# Altium PCB Module Hub.PcbDoc
Units mil, origin at the board's own origin, x right, y up, seen from the top; angles counter-clockwise.
Board outline 4190 x 1250 mil, 2 copper layers (Top Layer, Bottom Layer); 57 components, 64 nets, 256 pads, 350 vias.
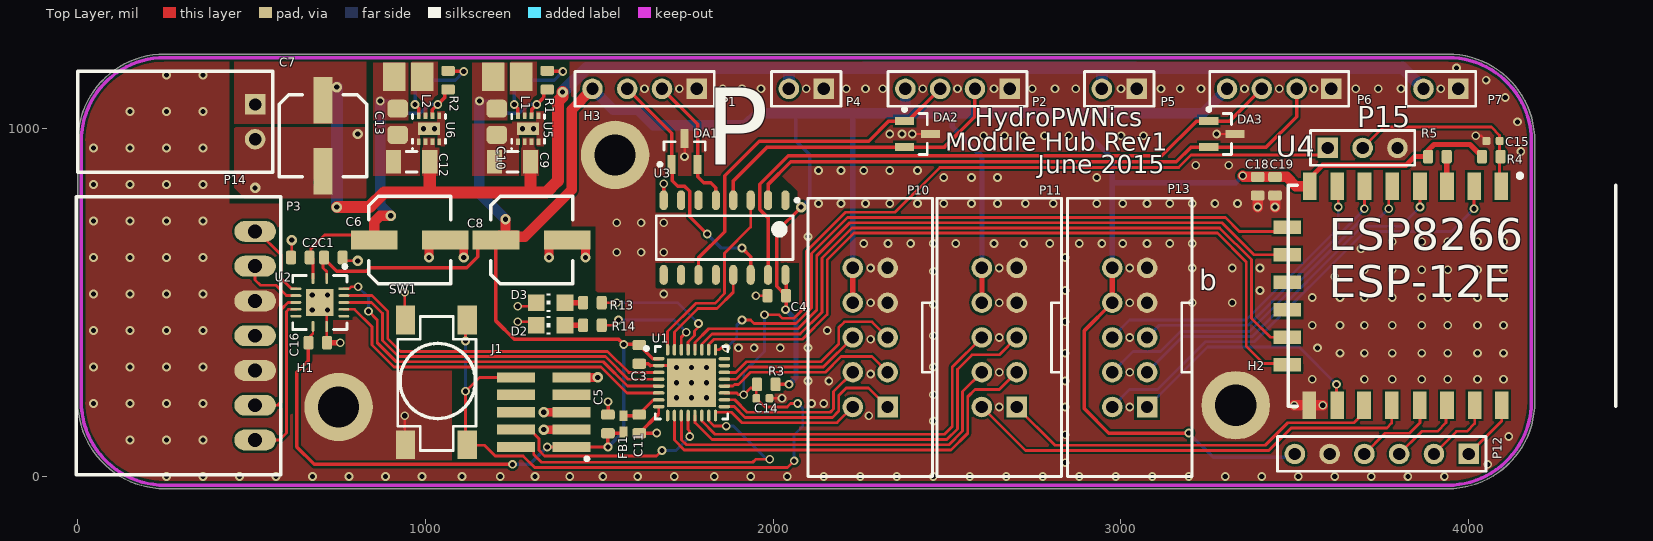
[diagram p0: Top Layer view]
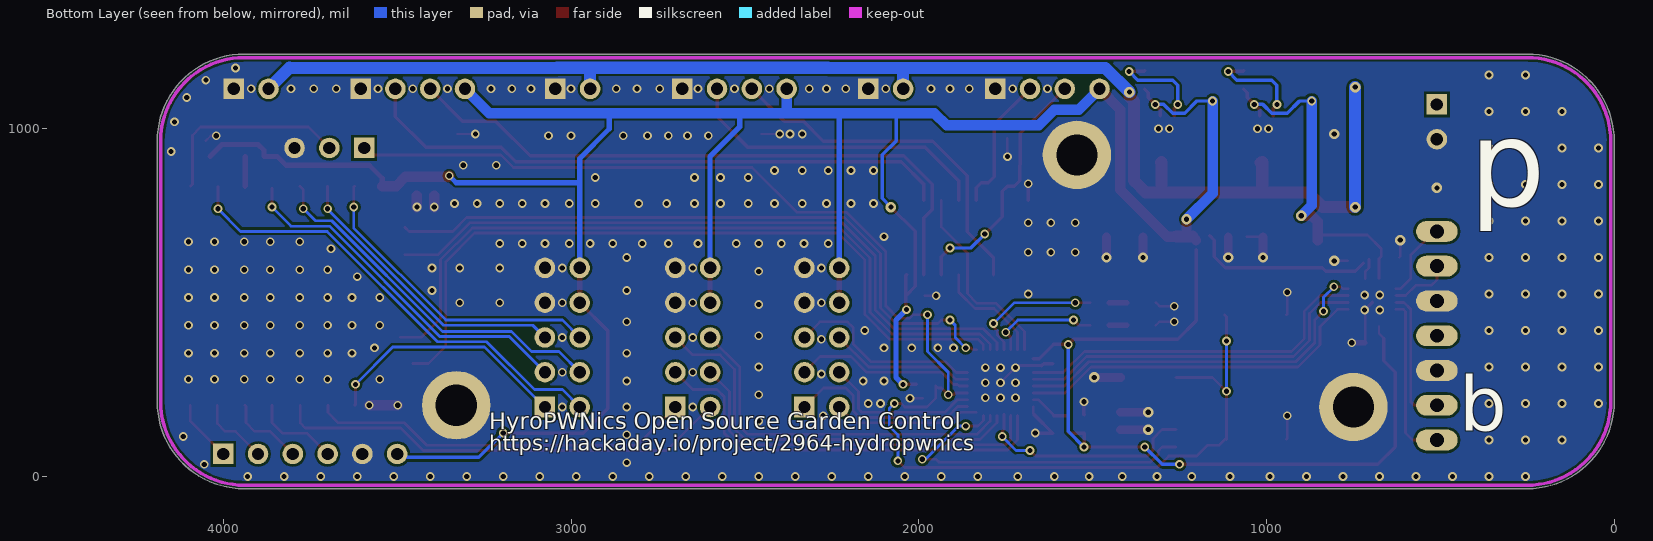
[diagram p1: Bottom Layer view, seen from below]

## Layer stack, top to bottom
Top Solder: solder mask 0.4, Solder Resist, Dk 3.5
Top Layer: signal copper 1.4
Dielectric 1: dielectric 12.6, FR-4, Dk 4.8
Bottom Layer: signal copper 1.4
Bottom Solder: solder mask 0.4, Solder Resist, Dk 3.5

## Board outline
0,215 0,965 cw(c250,965) 250,1215 3940,1215 cw(c3940,965) 4190,965 4190,215 cw(c3940,215) 3940,-35 250,-35 cw(c250,215)

## Design rules (kind name [scope] priority, off if disabled: settings)
AcuteAngle [All] p1: minimum=6.00000000000000E+0001 checktracksonly=FALSE
Clearance [All] p1: gap=7
ComponentClearance [All] p1: gap=0 collisioncheckmode=3 verticalgap=10 showdistances=FALSE
FanoutControl Fanout_SOIC [(InComponent('U8') AND InComponent('U7'))] p3: bgadir=Out bgaviamode=Centered fanoutstyle=Staggered fanoutdirection=Alternating viagrid=1 // Fanout_SOIC (Default Rule)
FanoutControl Fanout_Small [All] p4: bgadir=Out bgaviamode=Centered fanoutstyle=Auto fanoutdirection=Alternating viagrid=1 // Fanout_Small (Default Rule)
HoleSize [All] p1: absolutevalues=TRUE maxlimit=200 minlimit=15 maxpercent=80.000 minpercent=20.000
MinimumSolderMaskSliver [All] p1 off: minsoldermaskwidth=10
PasteMaskExpansion [All] p1: expansion=-1
PolygonConnect [All] p1: connectstyle=Direct reliefconductorwidth=10 reliefentries=4 polygonreliefangle="90 Angle" airgapwidth=10
RoutingVias [All] p1: holewidth=15 width=25 viastyle="Through Hole" minholewidth=15 minwidth=25 maxholewidth=28 maxwidth=50
SMDToCorner [All] p1: distance=30000
SilkToSilkClearance [All] p1 off: silktosilkclearance=10
SilkToSolderMaskClearance SilkscreenOverComponentPads [IsPad] p1 off: minsilkscreentomaskgap=10 clearancetoexposedcopper=TRUE
SolderMaskExpansion [All] p1: expansion=4
Width [All] p1: maxlimit=200 minlimit=7 preferedwidth=8 minimp=50.000000 maximp=50.000000 favimp=50.000000
22 further rules are at their usual default settings.

## Components (designator, comment, footprint, x,y, rotation, side; value= is the part's Value field where it differs from the comment)
C1 "100nF" C0603 735,630 r0 top
C2 "100nF" C0603 640,630 r180 top
C3 "100nF" C0603 1614.49,351.26 r270 top
C4 "100nF" C0603 2010,520 r180 top
C5 "0603" C0603 1524.49,151.26 r270 top
C6 "EEE-1VA101XP" EEE-1VA101XP 955,680 r180 top
C7 "EEE-1VA101XP" EEE-1VA101XP 705,980 r90 top
C8 "EEE-1VA101XP" EEE-1VA101XP 1305,680 r180 top
C9 "10uF 50V" C1206 1250,905 r180 top
C10 "0603" C0805 1205,1020 r90 top
C11 "0603" C0603 1614.49,151.26 r90 top
C12 "10uF 50V" C1206 960,905 r180 top
C13 "0603" C0805 920,1020 r90 top
C14 "100nF" C0402 1970,225 r0 top
C15 "100nF" C0402 4070,965 r180 top
C16 "100nF" C0603 690,385 r0 top
C18 "100nF" C0603 3393.03,834.92 r270 top
C19 "0603" C0603 3443.03,834.92 r90 top
D2 "5988140107F" LED2012120 1360,435 r180 top
D3 "5988140107F" LED2012120 1360,500 r180 top
DA1 "PESDxL2BT" SOT95P230X110-3N 1745,935 r90 top
DA2 "PESDxL2BT" SOT95P230X110-3N 2415,985 r0 top
DA3 "PESDxL2BT" SOT95P230X110-3N 3290,985 r0 top
FB1 "BLM15HG601SN1D" BLM18PG121SN1D 1569.49,151.26 r90 top
H1 "M3 Hole" Hole-3mm#1 750,200 r0 top
H2 "M3 Hole" Hole-3mm#2 3390,200 r0 top
H3 "M3 Hole" Hole-3mm#3 1550,835 r0 top
J1 "FTSH-105-XX-X-DV" FTSH-105-XX-X-DV 1340,185 r270 top
L1 "VLS252012T-2R2M1R3" VLS252012T-2R2M1R3 1235,1150 r180 top
L2 "VLS252012T-2R2M1R3" VLS252012T-2R2M1R3 950,1150 r180 top
P1 "Header 4" HDR1X4 1780,1115 r180 top
P2 "Header 4" HDR1X4 2680,1115 r180 top
P3 "Molex - 0705430006" 0705530041 510,705 r270 top
P4 "Header 2" HDR1X2 2145,1115 r180 top
P5 "Header 2" HDR1X2 3045,1115 r180 top
P6 "Header 4" HDR1X4 3605,1115 r180 top
P7 "Header 2" HDR1X2 3970,1115 r180 top
P10 "CNCTech 3020-10-0100-00" 3020-10-0100-00 2328.79,400 r90 top
P11 "CNCTech 3020-10-0100-00" 3020-10-0100-00 2700,400 r90 top
P12 "Header 6" HDR1X6 4000,65 r180 top
P13 "CNCTech 3020-10-0100-00" 3020-10-0100-00 3075,400 r90 top
P14 "Molex 0705530001" 0705530001 510,1070 r270 top
P15 "Header 3" HDR1X3 3595,945 r0 top
R1 "100K" R0603 1350,1140 r270 top
R2 "100K" R0603 1065,1140 r270 top
R3 "1K" R0603 1980,265 r0 top
R4 "1K" R0603 4065,920 r180 top
R5 "1K" R0603 3910,920 r0 top
R13 "1K" R0603 1480,500 r180 top
R14 "1K" R0603 1480,435 r180 top
SW1 "TL3301AF160QG" TL3301AF160QG 1120,450 r270 top
U1 "MKV10Z16VFM7 - 32 Pin QFN 5X5" MKV10Z16VFM7 1765,270 r0 top locked
U2 "TXS0104E" "RGY  (S-PVQFN-N14)" 696.1,500.63 r270 top locked
U3 "74HC4052" 74HC4052 1860,687.28 r270 top
U4 "ESP-12E" "ESP8266 ESP-12E" 3543.03,834.92 r270 top
U5 "TPS62162DSG" DSG8-1600X900TP 1295,1000 r90 top locked
U6 "TPS62163DSG" DSG8-1600X900TP 1010,1000 r90 top locked

## Footprints (in the part's own frame and the unit in brackets; to place one, negate y for a bottom-side part, rotate by r counter-clockwise, add the part's x,y. Pads: shape width x height; smd on the part's side, far side on the other; paste and mask are expansions set on the pad)
74HC4052 [mm] "SOIC, 16-Leads, Body 9.90x3.90mm, Pitch 1.27mm, IPC Medium Density"
  oval 1.45x0.6 smd: 1(-2.725,4.445) 2(-2.725,3.175) 3(-2.725,1.905) 4(-2.725,0.635) 5(-2.725,-0.635) 6(-2.725,-1.905) 7(-2.725,-3.175) 8(-2.725,-4.445) 9(2.725,-4.445) 10(2.725,-3.175) 11(2.725,-1.905) 12(2.725,-0.635) 13(2.725,0.635) 14(2.725,1.905) 15(2.725,3.175) 16(2.725,4.445)
  silkscreen extent -2.85,-5 1.6,5.42, body extent -2,-5 2,5, height 1.75
3020-10-0100-00 [mm] "2.54mm pitch 2X5 1 Pin Shrouded Connector"
  rect 1.5x1.5 hole 0.9: 1(-5.08,0)
  round 1.5 hole 0.9: 2(-5.08,2.54) 3(-2.54,0) 4(-2.54,2.54) 5(0,0) 6(0,2.54) 7(2.54,0) 8(2.54,2.54) 9(5.08,0) 10(5.08,2.54)
  silkscreen extent -10.16,-3.28 10.16,5.82, body extent -10.16,-3.3 10.16,5.84, height 9.1
0705530001 [mm]
  rect 1.5x1.5 hole 0.9: 1(0,0)
  round 1.5 hole 0.9: 2(2.54,0)
  silkscreen extent -2.44,-12.95 4.95,1.27, body extent -2.41,-12.88 4.95,0.71, height 6.96
0705530041 [mil] "Molex - 0705530041"
  oval 60x120 hole 40: 1(0,0) 2(100,0) 3(200,0) 4(300,0) 5(400,0) 6(500,0) 7(600,0)
  silkscreen extent -100,-515 700,73, body extent -100,-510 700,25, height 262
BLM18PG121SN1D [mm] "Chip Inductor, 2-Leads, Body 1.0x0.5mm, IPC Medium Density"
  rect 0.8x0.6 smd: 1(-0.6,0) 2(0.6,0)
  body extent -0.52,-0.28 0.53,0.27, height 0.6
C0402 [mil]
  rrect40% 22x24 smd: 1(-18.7,0) 2(19,0)
  body extent -20,-10 20,10, height 20
C0603 [mm]
  rrect40% 0.74x1 smd: 1(-0.68,0) 2(0.68,0)
  body extent -0.8,-0.4 0.8,0.4, height 0.8
C0805 [mil]
  rrect50% 52x60 smd: 1(-37.4,0) 2(38,0)
  body extent -40,-30 40,30, height 35
C1206 [mm]
  rect 1.1x1.7 smd: 1(-1.325,0) 2(1.325,0)
  silkscreen extent -0.4,-0.75 0.4,0.75, body extent -1.68,-0.87 1.67,0.88, height 1.6
DSG8-1600X900TP [mm] "SON, 8-Leads, Body 2x2mm, Pitch 0.5mm, Thermal Pad 1.6x0.9mm, TI Recommended"
  rect 0.5x0.28 smd paste-0.14 mask+0.07: 1(-0.95,0.75) 2(-0.95,0.25) 3(-0.95,-0.25) 4(-0.95,-0.75) 5(0.95,-0.75) 6(0.95,-0.25) 7(0.95,0.25) 8(0.95,0.75)
  rect 0.9x1.6 smd paste-0.45 mask+0.07: 9(0,0)
  silkscreen extent -1.5,-1.2 1.05,1.25, body extent -1.05,-1.05 1.05,1.05, height 0.8
EEE-1VA101XP [mm] "Panasonic VS D EEE-1VA101XP"
  rect 3.4x1.4 smd: 1(2.6,0) 2(-2.6,0)
  silkscreen extent -3,-3.2 3,3.2, body extent -3.5,-3.3 3.5,3.3, height 5.4
"ESP8266 ESP-12E" [mm]
  rect 2x1 smd: 1(0,13.99) 2(0,12.02) 3(0,10.02) 4(0,8.05) 5(0,6.01) 6(0,4) 7(0,2.01) 8(0,0) 15(16,-0.04) 16(16,2) 17(16,3.96) 18(16,5.98) 19(16,8.04) 20(16,10.02) 21(16,12.04) 22(16,14.02)
  rect 1x2 smd: 9(2.997,-1.651) 10(5.007,-1.651) 11(7.017,-1.651) 12(9.027,-1.651) 13(11.037,-1.651) 14(13.047,-1.651)
  silkscreen extent -0.91,-1.58 16.08,22.36, body extent 0,-1.52 16,22.48, height 2.7
FTSH-105-XX-X-DV [mm] "1.27mm pitch, 10 pin, terminal strip; vertical, SMT"
  rect 0.75x2.8 smd mask+0: 1(2.54,2.03) 2(2.54,-2.03) 3(1.27,2.03) 4(1.27,-2.03) 5(0,2.03) 6(0,-2.03) 7(-1.27,2.03) 8(-1.27,-2.03) 9(-2.54,2.03) 10(-2.54,-2.03)
  silkscreen extent 3.28,3.03 3.52,3.27
HDR1X2 [mm] "Connector; Header; 2 Position"
  rect 1.5x1.5 hole 0.9: 1(0,0)
  round 1.5 hole 0.9: 2(2.54,0)
  silkscreen extent -1.27,-1.27 3.81,1.27
HDR1X3 [mm] "Connector; Header; 3 Position"
  rect 1.5x1.5 hole 0.9: 1(0,0)
  round 1.5 hole 0.9: 2(2.54,0) 3(5.08,0)
  silkscreen extent -1.27,-1.27 6.35,1.27
HDR1X4 [mm] "Connector; Header; 4 Position"
  rect 1.5x1.5 hole 0.9: 1(0,0)
  round 1.5 hole 0.9: 2(2.54,0) 3(5.08,0) 4(7.62,0)
  silkscreen extent -1.27,-1.27 8.89,1.27
HDR1X6 [mm] "Connector; Header; 6 Position"
  rect 1.5x1.5 hole 0.9: 1(0,0)
  round 1.5 hole 0.9: 2(2.54,0) 3(5.08,0) 4(7.62,0) 5(10.16,0) 6(12.7,0)
  silkscreen extent -1.27,-1.27 13.97,1.27
Hole-3mm#1 [mm]
  round 5 hole 3: 1(0,0)
Hole-3mm#2 [mm]
  round 5 hole 3: 1(-1.524,0.127)
Hole-3mm#3 [mm]
  round 5 hole 3: 1(-0.127,2.286)
LED2012120 [mil]
  rect 48x48 smd: A(-41.34,0) C(42,0)
  silkscreen extent 0,-27 12,27, body extent -50,-25 50,25, height 28
MKV10Z16VFM7 [mm] "QFN, 32-Leads, Body 5.00x5.00mm, Pitch 0.50mm, Thermal Pad 3.60x3.60mm, IPC Medium Density"
  oval 0.85x0.25 smd: 1(-2.4,1.75) 2(-2.4,1.25) 3(-2.4,0.75) 4(-2.4,0.25) 5(-2.4,-0.25) 6(-2.4,-0.75) 7(-2.4,-1.25) 8(-2.4,-1.75) 17(2.4,-1.75) 18(2.4,-1.25) 19(2.4,-0.75) 20(2.4,-0.25) 21(2.4,0.25) 22(2.4,0.75) 23(2.4,1.25) 24(2.4,1.75)
  oval 0.25x0.85 smd: 9(-1.75,-2.4) 10(-1.25,-2.4) 11(-0.75,-2.4) 12(-0.25,-2.4) 13(0.25,-2.4) 14(0.75,-2.4) 15(1.25,-2.4) 16(1.75,-2.4) 25(1.75,2.4) 26(1.25,2.4) 27(0.75,2.4) 28(0.25,2.4) 29(-0.25,2.4) 30(-0.75,2.4) 31(-1.25,2.4) 32(-1.75,2.4)
  rect 3.556x3.556 smd: 33(0,0)
  silkscreen extent -3.42,-2.65 2.65,2.65, body extent -2.5,-2.5 2.5,2.5, height 1
R0603 [mm]
  rrect40% 0.74x1 smd: 1(-0.68,0) 2(0.68,0)
  body extent -0.8,-0.4 0.8,0.4, height 0.8
"RGY  (S-PVQFN-N14)" [mm] "QFN, 16-Leads, Body 3.50x3.50mm, Pitch 0.50mm, Thermal Pad 2.00x2.00mm, IPC Medium Density"
  oval 0.8x0.2 smd: 1(-1.75,0.5) 7(1.75,0.5) 8(1.75,-0.5) 14(-1.75,-0.5)
  oval 0.2x0.8 smd: 2(-1,1.75) 3(-0.5,1.75) 4(0,1.75) 5(0.5,1.75) 6(1,1.75) 9(1,-1.75) 10(0.5,-1.75) 11(0,-1.75) 12(-0.5,-1.75) 13(-1,-1.75)
  rect 2x2 smd: 15(0,0)
  silkscreen extent -2.75,-1.97 1.97,1.97, body extent -1.83,-1.83 1.83,1.83, height 1
SOT95P230X110-3N [mm]
  rect 1.4x0.6 smd: 1(-0.95,0.95) 2(-0.95,-0.95) 3(0.95,0)
  silkscreen extent -1.07,-1.5 0.7,1.92, body extent -0.7,-1.5 0.7,1.5, height 1.1
TL3301AF160QG [mm] "TL3301AF160QG Tactile Switch"
  rect 2.1x1.4 smd: 1(0,0) 1(9.1,0) 2(0,-4.5) 2(9.1,-4.5)
  silkscreen extent -0.25,-5.08 9.53,0.64, body extent -0.43,-5.26 9.57,0.74, height 5.11
VLS252012T-2R2M1R3 [mm] "Precision Wire Wound Inductor, 2-Leads, Body 2.5x2.0mm, IPC Medium Density"
  rect 1.65x2.1 smd: 1(-1.025,0) 2(1.025,0)
  body extent -1.3,-1.05 1.3,1.05, height 1.2

## Part data
C1 C2 C3 C4 C16 C18: library part C0603C104K5RACTU, "CAP CER 0603 100nF 50V 10% X7R"
C5 C11 C19: library part C1608JB0J106K080AB, "CAP CER 10UF 6.3V 10% JB 0603"
C6 C7 C8: "CAP ALUM 100UF 35V 20% SMD"
C9 C12: library part CL31A106KBHNNNE, "CAP CER 10UF 50V 10% X5R 1206"
C10 C13: library part CL21A226KQQNNNE, "CAP CER 22UF 6.3V 10% X5R 0805"
C14 C15: library part GRM155R71C104KA88D, "CAP CER 0402 100nF 16V 10% X7R"
D2 D3: "LED 0805 Yellow"
DA1 DA2 DA3: "PESDxL2BT TVS Diode Array 2x"
H1 H2 H3: library part Hole, "3mm Hole"
J1: library part "ARM Cortex JTAG-DEBUG Header"
P1 P2 P6: "Header, 4-Pin"
P3: library part 0705530041, "0705530041"
P4 P5 P7: "Header, 2-Pin"
P10 P11 P13: library part 3020-10-0100-00
P12: "Header, 6-Pin"
P14: library part 0705530001, "Molex 0705530002 Right Angle 2.54mm Shrouded Header"
P15: "Header, 3-Pin"
R1 R2: library part RC0603FR-07100KL, "RES 100K OHM 1/10W 1% 0603 SMD"
R3 R4 R5 R13 R14: library part ERJ-3EKF1001V, "RES 0603 1K 100mW 1%"
U1: library part MKV10Z16VFM7, "IC MCU ARM Cortex M0+ 16KB 32QFN 75MHZ"
U2: "TXS0104E - Bidriectional Opendrain/pushpull level shift"
U3: "Dual 4-channel analog multiplexer/demultiplexer"
U4: library part ESP-12, "Sketchy Chinese ESP8266 Board with Fake FCC Bullshit"
U5 U6: library part TPS62162SOP

## Via types
v1: diameter 25, hole 15, Top Layer to Bottom Layer, tented both sides, 333 vias
v2: diameter 30, hole 15, Top Layer to Bottom Layer, tented both sides, 17 vias

## Nets (pads, with @x,y where several pads share a name; then routed paths per layer and width w, separated by ;. In a path a pad name is that pad's centre, name@x,y a point inside that pad or via, vN(x,y) a via of type N, cw(c..) or ccw(c..) an arc to the next point about the centre after c; other vN are vias at no path point)
3.3VCC: C1.1 C3.1 C4.1 C5.2 C8.1 C10.2 C16.1 C18.1 C19.2 FB1.1 J1.1 L1.2 P1.4 P2.4 P6.4 P10.8 P10.10 P11.8 P11.10 P12.6 P13.8 P13.10 R1.2 R3.2 R4.2 R5.1 U1.1 U2.1 U2.8 U3.16 U4.8 U5.6 | length 11115.2
  Top Layer w7: C16.1@663.23,398.23 676.42,411.42 U2.8
  Top Layer w8: C1.1@705,625 705,600 715.79,589.21 U2.1
  Top Layer w10: C16.1@663.23,398.23 C16.1 663.23,333.23 630,300 630,85 680,35 v1(1250,35) ; C1.1@721.61,613.39 745,590 830,590 840,600 1118.18,600 1150,631.82 1150,680 C8.1@1162.5,692.5 ; 1202.64,652.36 1202.64,447.36 1255,395 1555,395 v1(1570,380) 1612.52,380 C3.1 1653.62,338.9 U1.1 ; U5.6 1304.84,1054.84 v1(1320,1070) 1340,1090 1340,1103.22 R1.2 ; v1(1350,85) J1.1 v1(1525,85) 1524.49,85.51 C5.2 1566.34,124.49 FB1.1 ; R3.2 v1(2045,265) ; v1(2035,480) 2036.77,481.77 C4.1 2010,546.77 2010,705 v2(2080,775) ; U3.16 2036.77,578.23 C4.1@2036.77,522.28 ; P13.8 2895,420 2895,195 2965,125 v1(3195,125)
  Top Layer w15: P10.8 P10.10 ; P11.8 P11.10 ; P13.8 P13.10 ; U4.8 3543.03,858.03 3580,895 3820,895 3845,920 R5.1 3883.23,938.23 3900,955 4003.22,955 R4.2
  Top Layer w30: C8.1 C8.1@1212.64,690 ; C8.1@1230,707.36 v2(1230,740) ; C8.1@1260,690 1285,690 1420,825 1420,1055 P1.4 ; v1(3350,865) 3353.31,861.69 C18.1 C19.2 3476.26,861.69 3503.03,834.92 U4.8
  Top Layer w35: C8.1@1212.64,690 C8.1@1260,690
  Bottom Layer w10: v1(1155,1080) 1200,1080 1235,1045 1270,1045 1295,1070 v1(1320,1070) ; v1(1250,35) 1300,35 v1(1350,85) ; v1(1525,85) 1570,130 v1(1570,380) ; 2065,1045 2065,965 2105,925 2105,800 v2(2080,775) ; v1(3195,125) 3265,55 3490,55 P12.6
  Bottom Layer w15: v1(2035,480) 2065,450 2065,285 v1(2045,265) ; P10.10 2228.79,1036.29 2237.5,1045 ; 2515,1045 2515,1005 2600,920 P11.10 ; 2890,1045 2890,1000 2975,915 2975,845 ; P13.10 2975,845 ; v1(3350,865) 3330,845 2975,845
  Bottom Layer w30: v1(1155,1080) 1155,815 v2(1230,740) ; P1.4 1540,1055 1610,1055 1655,1010 1920,1010 1955,1045 2065,1045 2237.5,1045 2380,1045 ; P2.4 2380,1045 ; P6.4 3235,1045 2890,1045 2515,1045 2380,1045
5VCC: C2.1 C6.1 C13.2 L2.2 R2.2 U2.14 U6.6 | length 1008.7
  Top Layer w8: U2.14 676.42,626.42 670,632.83 670,655 710,695 C6.1@840,695
  Top Layer w10: U6.6 1019.84,1054.84 v1(1035,1070) 1055,1090 1055,1103.22 R2.2
  Top Layer w30: C6.1 852.64,732.64 870,750 v2(900,750)
  Bottom Layer w10: v1(870,1080) 905,1080 940,1045 985,1045 1010,1070 v1(1035,1070)
  Bottom Layer w30: v1(870,1080) 870,780 v2(900,750)
12VCC: C7.1 C9.1 C12.1 P4.2 P5.2 P7.2 P14.1 U5.2 U5.3 U6.2 U6.3 | length 4102.9
  Top Layer w30: C12.1@1017.17,905 C12.1@1020,902.17 ; C9.1 C9.1@1305,902.17
  Top Layer w35: v2(745,775) 839.14,775 881.3,817.17 1302.17,817.17 ; 1012.17,822.17 C12.1 ; C9.1 1302.17,817.17 ; v2(1394.19,1105.59) 1394.19,1091.92 1380.5,1078.23 1380.5,850.5 1347.17,817.17 1302.17,817.17
  Bottom Layer w35: v2(745,775) v2(745,1120) ; v2(1394.19,1105.59) 1463.59,1175 2040,1175 ; P4.2 2045,1170 2040,1175 ; 2260,1175 2040,1175 ; 2260.5,1175.5 2945,1175.5 ; P5.2 2945,1175.5 ; 3039.5,1175 3809.5,1175 ; 3039.5,1175.5 2945,1175.5 ; 3809.5,1175.5 P7.2
ESP_ADC: P13.2 U4.2 | length 1339.8
  Top Layer w8: v1(4015,770) U4.2@4015,833.66
  Bottom Layer w8: P13.2 3025,250 3105,250 3242.5,387.5 3383.71,387.5 3701.21,705 3950,705 v1(4015,770)
ESP_MK_CS: U1.25 U4.9 | length 1943.5
  Top Layer w8: U1.25 1844.49,364.49 1850,370 v1(1865,370) ; v1(1910,450) 1935,450 1945,440 2065,440 2110,485 2110,641.21 2213.79,745 3300,745 3340,705 3466.11,705 U4.9
  Bottom Layer w8: v1(1865,370) 1895,400 1895,435 v1(1910,450)
ESP_RESET: C15.1 P15.2 R4.1 U4.1 | length 576.9
  Top Layer w8: P15.2 3755,1005 4065,1005 4088.7,981.3 C15.1 4088.7,840.04 U4.1
EXP0: P10.2 U1.16 | length 446.1
  Top Layer w8: U1.16@1835,185 1879.49,185 1909.49,155 2183.79,155 P10.2 P10.2@2228.79,178.79
EXP1: P10.1 U1.17 | length 566.5
  Top Layer w8: U1.17 1887.68,201.1 1918.79,170 2170,170 2188.26,188.26 2188.26,233.26 2210,255 2273.79,255 P10.1
EXP2: P10.4 U1.18 | length 461
  Top Layer w8: U1.18 1889.21,220.79 1925,185 2163.79,185 2173.26,194.47 2173.26,244.47 P10.4
EXP3: P10.3 U1.20 | length 523.1
  Top Layer w8: U1.20 1883.94,260.16 1888.79,265 1900,265 1935,300 2150,300 2195,345 2283.79,345 P10.3
EXP4: P10.6 U1.21 | length 419.1
  Top Layer w8: U1.21 1859.65,280 1893.79,280 1928.79,315 2143.79,315 P10.6
EXP5: P10.5 U1.22 | length 576.1
  Top Layer w8: U1.22 1892.1,299.53 1922.57,330 2137.57,330 2188.26,380.69 2188.26,428.26 2205,445 2283.79,445 P10.5
EXP6: P11.6 U1.14 | length 1053.1
  Top Layer w8: U1.14 1794.53,159.34 1832.37,121.5 2492.86,121.5 2514.47,143.11 2514.47,314.47 P11.6
EXP7: P11.5 U1.13 | length 1187.7
  Top Layer w8: U1.13 1775,175.51 1775,155 1823.5,106.5 2499.07,106.5 2529.47,136.9 2529.47,308.26 2571.21,350 2650,350 P11.5
EXP8: P11.4 U1.11 | length 1092.9
  Top Layer w8: U1.11 1736.5,174.48 1736.5,105.27 1750.27,91.5 2505.29,91.5 2544.47,130.69 2544.47,244.47 P11.4
EXP9: P11.3 U1.10 | length 1220.8
  Top Layer w8: U1.10 1715.79,104.77 1744.05,76.5 2511.5,76.5 2559.47,124.47 2559.47,229.47 2580,250 2650,250 P11.3
GND: C1.2 C2.2 C3.2 C4.2 C5.1 C6.2 C7.2 C8.2 C9.2 C10.1 C11.1 C12.2 C13.1 C14.2 C15.2 C16.2 C18.2 C19.1 D2.C D3.C DA1.3 DA2.3 DA3.3 H1.1 H2.1 H3.1 J1.3 J1.5 J1.9 P1.1 P2.1 P3.3 P3.5 P4.1 P5.1 P6.1 P7.1 P10.7 P10.9 P11.7 P11.9 P12.5 P13.7 P13.9 P14.2 P15.3 SW1.2 U1.2 U1.8 U1.33 U2.7 U2.15 U3.8 U4.15 U5.1 U5.4 U5.5 U5.9 U6.1 U6.4 U6.5 U6.9 | length 1809
  Top Layer w7: v2@615,675 615,633.23 C2.2@618.23,630 ; U2.15@715.79,480.94 U2.7 715.79,385.98 C16.2 ; C1.2@766.77,620 v2(805,620) ; v1(940,175) 940,109.57 SW1.2@942.83,106.73 ; v1(940,530) 940,467.83 SW1.2@942.83,465 ; C6.2@1010,690 C6.2@1057.36,690 ; v1(1265,445) 1308,445 D2.C ; v1(1265,490) 1308,490 D3.C ; 1670,180 1670.51,180.51 U1.8 ; U1.33@1715.79,319.21 v1(1721.69,313.31) v1(1765,270) ; v1(1745,920) DA1.3 ; v1(1950,520) C4.2 ; C14.2 v1(2025,225) ; v1(2400,985) DA2.3 ; v1(3275,985) DA3.3 ; v1(4020,980) 4036,980 C15.2
  Top Layer w9: 1645.79,319.21 U1.2 U1.33@1715.79,319.21
  Top Layer w10: U2.15 U2.15@715.79,480.94 ; C5.1 1525,178.54 v1(1525,215) ; C11.1 C11.1@1615,125 ; C3.2 1640.51,324.49 1645.79,319.21 ; v1(1665,125) C11.1@1615,125 ; 1670,180 C11.1@1615,125 ; U3.8 v1(1685,842.28)
  Top Layer w15: C16.2 v1(755,385)
  Top Layer w25: v2(1010,630) C6.2@1010,690 ; v2@1110,640 C6.2@1110,690 ; v2(1340,135) J1.3 ; v2(1340,185) J1.5 ; v2@1355,640 C8.2@1355,690 ; J1.9 v2(1495,285) ; v2@1460,640 C8.2@1460,690
  Top Layer w30: v1(3393.03,774.92) C18.2 ; v1(3443.03,774.92) C19.1 ; v1(3498.03,204.92) v1@3580,204.92
  other v1: 255,0 360,0 465,0 570,0 675,0 780,0 885,0 990,0 1105,0 1215,0 1315,0 1415,0 1510,0 1610,0 1715,0 1830,0 1935,0 2040,0 2145,0 2250,0 2355,0 2460,0 2565,0 2670,0 2775,0 2880,0 2985,0 3090,0 3195,0 3300,0 3405,0 3510,0 3615,0 3720,0 3825,0 3930,0 4055,35 2840,40 150,105 255,105 360,105 4115,115 2840,120 2460,160 2275,175 2650,200 2840,200 3025,200 3580,205 45,210 150,210 255,210 360,210 2110,210 2145,210 1721.69,226.69 1765,226.69 1808.31,226.69 2460,235 1721.69,270 1808.31,270 2100,275 2160,275 2840,275 3550,280 3700,280 3780,280 3865,280 3940,280 4025,280 4100,280 2280,295 2650,300 3025,300 1765,313.31 1808.31,313.31 45,315 150,315 255,315 360,315 2460,315 2840,355 3630,355 3700,355 3780,355 3865,355 3940,355 4025,355 4100,355 1900,370 1945,370 2020,370 2100,370 3565,370 2280,395 2650,400 3025,400 2460,405 45,420 150,420 255,420 360,420 2155,420 3550,435 3630,435 3700,435 3780,435 3865,435 3940,435 4025,435 4100,435 2840,445 674.45,478.98 717.76,478.98 2460,495 2280,500 2650,500 3025,500 3205,500 3320,500 3550,515 3630,515 3700,515 3780,515 3865,515 3940,515 4025,515 4100,515 674.45,522.28 717.76,522.28 45,525 150,525 255,525 360,525 1685,525 2840,535 3400,535 3615,575 2460,590 3700,595 3780,595 3865,595 3940,595 4025,595 4100,595 2280,600 2650,600 3025,600 3205,600 3320,600 3400,600 45,630 150,630 255,630 360,630 2840,630 1550,645 1620,645 1685,645 3690,655 2260,670 2330,670 2395,670 2460,670 2525,670 2635,670 2720,670 2795,670 2880,670 2945,670 3005,670 3075,670 3140,670 3205,670 3780,675 3865,675 3940,675 4025,675 4100,675 2100,690 1550,730 1620,730 1685,730 45,735 150,735 255,735 360,735 2130,785 2195,785 2265,785 2335,785 2415,785 2490,785 2570,785 2645,785 2725,785 2805,785 2930,785 3005,785 3075,785 3140,785 3205,785 3270,785 3335,785 45,840 150,840 255,840 360,840 2490,860 2570,860 2645,860 2930,860 2130,880 2195,880 2260,880 2335,880 2415,880 3215,895 3310,895 4150,935 45,945 150,945 255,945 360,945 2605,980 2665,980 2720,980 2780,980 2850,980 3000,980 3065,980 2335,985 2370,985 994.25,1000 1025.75,1000 1279.25,1000 1310.75,1000 4140,1020 150,1050 255,1050 360,1050 4105,1090 1630,1115 1730,1115 1855,1115 1910,1115 1965,1115 2095,1115 2210,1115 2265,1115 2315,1115 2430,1115 2530,1115 2635,1115 2745,1115 2810,1115 2870,1115 3000,1115 3115,1115 3170,1115 3230,1115 3355,1115 3455,1115 3555,1115 3675,1115 3740,1115 3805,1115 3920,1115 4050,1140 255,1155 360,1155 3965,1175
  other v2: 1110,630 1355,630 1460,630 615,680 510,830 805,985
GPIO0: P11.2 U4.18 | length 1314.3
  Top Layer w8: P11.2 2725,75 3425,75 3489.63,139.63 3764.63,139.63 3778.46,153.46 U4.18
GPIO2: P11.1 U4.17 | length 1104.5
  Top Layer w8: P11.1 2810,90 3415,90 3479.63,154.63 3669.63,154.63 3698.94,183.94 U4.17
GPIO12: P13.5 U4.6 | length 844.1
  Top Layer w8: v1(3700,770) 3700,834.41 U4.6
  Bottom Layer w8: P13.5 3110,435 3366.21,435 3700,768.79 v1(3700,770)
GPIO13: P13.6 U4.7 | length 901.6
  Top Layer w8: U4.7 3625,832.09 v1(3625,775)
  Bottom Layer w8: P13.6 3025,450 3360,450 3625,715 v1(3625,775)
GPIO14: P13.4 U4.5 | length 1057.6
  Top Layer w8: v1(3770,770) 3770,825.28 U4.5
  Bottom Layer w8: P13.4 3034.47,359.47 3113.26,359.47 3171.29,417.5 3369.93,417.5 3687.93,735.5 3734.5,735.5 v1@3769,770
GPIO15: P13.1 U4.16 | length 721.7
  Top Layer w8: v1(3620,265) 3620,206.77 U4.16
  Bottom Layer w8: P13.1 3076.21,200 3248.71,372.5 3512.5,372.5 v1(3620,265)
GPIO16: P13.3 U4.4 | length 1036.8
  Top Layer w8: v1(3860,775) U4.4@3860,830
  Bottom Layer w8: P13.3 3177.5,402.5 3377.5,402.5 3695,720 3805,720 v1(3860,775)
NetC11_2: C11.2 FB1.2 U1.7 | length 116.4
  Top Layer w8: C11.2 1614.49,179.41 1655.87,220.79 U1.7
  Top Layer w10: FB1.2 C11.2@1611.34,174.88
NetD2_A: D2.A R14.2 | length 51.9
  Top Layer w15: D2.A R14.2
NetD3_A: D3.A R13.2 | length 51.9
  Top Layer w15: D3.A R13.2
NetL1_1: L1.1 U5.7
NetL2_1: L2.1 U6.7
NetP12_1: P12.1 U4.22 | length 179.4
  Top Layer w8: P12.1 4095,160 U4.22
NetP12_2: P12.2 U4.21 | length 206.1
  Top Layer w8: P12.2 3965,130 3995,130 4017.05,152.05 U4.21
NetP12_3: P12.3 U4.20 | length 223.3
  Top Layer w8: P12.3 3865,130 3910,130 3935,155 3935,202.48 U4.20
NetP12_4: P12.4 U4.19 | length 247.1
  Top Layer w8: P12.4 3759.63,124.63 3829.63,124.63 3859.57,154.57 U4.19
NetR1_1: R1.1 U5.8 | length 294.2
  Top Layer w10: v1(1255,1070) 1265.47,1059.53 U5.8 ; R1.1 1351.77,1165 v1(1395,1165)
  Bottom Layer w10: v1(1255,1070) 1255,1125 1270,1140 1370,1140 v1(1395,1165)
NetR2_1: R2.1 U6.8 | length 294.2
  Top Layer w10: v1(970,1070) 980.47,1059.53 U6.8 ; R2.1 1066.77,1165 v1(1110,1165)
  Bottom Layer w10: v1(970,1070) 970,1125 985,1140 1085,1140 v1(1110,1165)
NetR5_2: R5.2 U4.3 | length 85.4
  Top Layer w15: R5.2 3936.77,835.67 U4.3
RESET: C14.1 J1.10 P15.1 R3.1 SW1.1 U1.19 | length 4122.8
  Top Layer w8: SW1.1@1115,106.73 v1(1115,245) 1155,285 J1.10 ; v1@1115,400 1115,460 SW1.1@1120,465 ; SW1.1@1120,106.73 1136.73,90 1169.64,90 1200.41,59.24 1280.76,59.24 1314,26 2041,26 v1(2060,45) ; U1.19 1895,240.47 1900.47,235 v1(1915,235) 1935,255 1945,255 1951.3,261.3 C14.1 1976.3,200 2040,200 2050,210 v1(2070,210) ; v1(1975,465) 2016.77,465 2026.77,455 2058.79,455 2095,491.21 2095,647.43 2207.57,760 2350,760 2479,889 3165.87,889 3201.65,924.79 3574.79,924.79 P15.1
  Bottom Layer w8: v1(1115,245) v1(1115,390) ; v1(1915,235) 1915,300 1975,360 v1(1975,465) ; v1(2060,45) 2060,120 2085,145 2085,195 v1(2070,210)
RX_LED: R14.1 U1.30 | length 320.5
  Top Layer w8: R14.1 1540,435 v1(1555,450) ; U1.30 1735.47,400.47 v1(1750,415)
  Bottom Layer w8: v1(1555,450) 1715,450 v1(1750,415)
SM0_RX: DA1.2 P1.2 U3.5 | length 396.4
  Top Layer w10: P1.2 1782.4,1012.6 DA1.2 1782.4,862.6 1800,845 1820,845 1835,830 U3.5
SM0_TX: DA1.1 P1.3 U3.14 | length 728.9
  Top Layer w10: P1.3 1707.6,987.4 DA1.1 1709.5,895.7 1709.5,850.5 1724.89,835.11 1744.86,835.11 1760,819.97 1760,747.28 v1(1810,697.28) ; v1(1910,657.28) 1935,632.28 U3.14
  Bottom Layer w10: v1(1810,697.28) 1850,657.28 v1(1910,657.28)
SM1_RX: DA2.2 P2.2 U3.4 | length 907.1
  Top Layer w10: U3.4 1885,850 1982.6,947.6 DA2.2 2492.6,947.6 2580,1035 P2.2
SM1_TX: DA2.1 P2.3 U3.11 | length 1039.6
  Top Layer w10: U3.11 1785,629.43 1860,704.43 1860,865 1959.6,964.6 2274.6,964.6 2332.4,1022.4 DA2.1 2387.4,1022.4 P2.3
SM2_RX: DA3.2 P6.2 U3.2 | length 1726.2
  Top Layer w10: U3.2 1985,840 2050,905 3159.24,905 3201.84,947.6 DA3.2 3417.6,947.6 3505,1035 P6.2
SM2_TX: DA3.1 P6.3 U3.15 | length 1827.7
  Top Layer w10: U3.15 1985,744.16 1961.19,767.97 1961.19,840.23 2042.96,922 3117,922 3217.4,1022.4 DA3.1 3312.4,1022.4 P6.3
SM3_RX: U3.12
SM3_TX: U3.1
SPI0_MISO: U1.28 U4.10 | length 1996.5
  Top Layer w8: U1.28 1774.84,385.4 1814.45,425 2071.21,425 2125,478.79 2125,635 2220,730 3290,730 3382.13,637.87 3477.95,637.87 U4.10
SPI0_MOSI: U1.27 U4.13 | length 2170.8
  Top Layer w8: U1.27 1794.53,380.66 1823.87,410 2077.43,410 2140,472.57 2140,628.79 2226.21,715 3283.79,715 3375,623.79 3375,455 3429.53,400.47 U4.13@3490,400.47
SPI0_SCK: U1.26 U4.14 | length 2177.3
  Top Layer w8: U1.26 1814.21,379.13 1830.08,395 2083.64,395 2155,466.36 2155,622.57 2232.43,700 3277.57,700 3360,617.57 3360,375 3410,325 U4.14@3455,325
TCK/SWDCLK: J1.4 U1.12 | length 641.1
  Top Layer w8: J1.4 1300,135 1326.2,108.8 1326.2,75.57 1342.53,59.24 1664.24,59.24 v1(1680,75) ; U1.12@1754.65,180 1754.65,135.35 1760,130 v1(1760,115)
  Bottom Layer w8: v1(1680,75) 1720,75 v1(1760,115)
TDI: J1.8
TDO/SWO: J1.6
TMS/SWDIO: J1.2 U1.15 | length 994.3
  Top Layer w8: J1.2 1300,85 1311.2,73.8 1311.2,63.8 1334,41 1941,41 1950,50 v1(1990,50) ; U1.15@1813.7,175.51 1813.7,161.38 1830.08,145 v1(1865,145)
  Bottom Layer w8: v1(1865,145) 1885,145 1980,50 v1(1990,50)
TX_LED: R13.1 U1.29 | length 391
  Top Layer w8: R13.1 v1(1550,500) ; U1.29 1755.16,386.92 1773.5,405.27 1773.5,418.5 1785,430 v1(1785,440)
  Bottom Layer w8: v1(1550,500) 1725,500 v1(1785,440)
UART0_RX: U1.31 U3.13 | length 317.8
  Top Layer w8: U1.31 1715.79,415.79 1783.17,483.17 1838.17,483.17 1885,530 U3.13
UART0_TX: U1.32 U3.3 | length 561.3
  Top Layer w8: U1.32 1696.1,417.32 1776.96,498.17 1831.96,498.17 1860,526.21 1860,642.28 1935,717.28 U3.3
UART1_CTS: U1.5 U2.2 | length 1088.1
  Top Layer w8: U2.2 780.47,540 786.1,545.63 v1(806.1,545.63) ; v1(836.1,475.63) 861.1,450.63 861.1,384.85 915.95,330 1511.21,330 1581.06,260.16 U1.5
  Bottom Layer w8: v1(806.1,545.63) 836.1,515.63 v1(836.1,475.63)
UART1_CTS_5V: P3.1 U2.13 | length 224.8
  Top Layer w8: P3.1@517.07,705 585,637.07 585,570 615,540 U2.13
  Top Layer w35: P3.1 P3.1@517.07,705
UART1_RTS: U1.6 U2.5 | length 1035.6
  Top Layer w8: U2.5 795.79,480.94 846.1,430.63 846.1,378.64 909.74,315 1505,315 1579.53,240.47 U1.6
UART1_RTS_5V: P3.7 U2.10 | length 478
  Top Layer w8: P3.7 580,105 600,125 600,475 605.94,480.94 U2.10
UART1_RX: U1.4 U2.4 | length 1042.9
  Top Layer w8: U2.4 844.89,500.63 876.1,469.42 876.1,391.06 922.17,345 1517.43,345 1582.58,279.84 U1.4
UART1_RX_5V: P3.6 U2.11 | length 395.6
  Top Layer w8: P3.6 575,205 585,215 585,481.21 604.42,500.63 U2.11
UART1_TX: U1.3 U2.3 | length 1043.7
  Top Layer w8: U2.3 846.42,520.31 891.1,475.63 891.1,397.28 928.38,360 1523.64,360 1584.72,298.92 1670.51,298.92 U1.3
UART1_TX_5V: P3.2 U2.12 | length 175.7
  Top Layer w8: P3.2 510,565 525,550 570,550 599.68,520.31 U2.12
pads on no net: J1.7 P3.4 U1.9 U1.23 U1.24 U2.6 U2.9 U3.6 U3.7 U3.9 U3.10 U4.11 U4.12

## Polygon pours and split planes (outlines as drawn)
GND on Top Layer "Top Layer-No Net" (solid, remove dead copper, pour order 56): 3325,750 3555,750 3555,325 3325,325
GND on Top Layer "Top Layer-No Net" (solid, remove dead copper, pour order 50): 1625,760 1625.86,759.14 2095.86,759.14 2095.86,615.86 2095,615 1950,615 1625,615
GND on Top Layer "Bottom Layer-No Net" (solid, remove dead copper, pour order 48): 1420,1025 1420,720 1490,720 1490,535 1495,530 1575,530 1575,405 1685,405 1685,406.21 1776.96,498.17 1831.96,498.17 1860,526.21 1860,540 1800,540 1795,540 1790,540 1785,540 1665,540 1660,545 1660,810 1660,890
GND on Top Layer "Top Layer-No Net" (solid, remove dead copper, pour order 58): 3415,300 4180,300 4175,295 4175,55 3515,55 3415,155
GND on Top Layer "Top Layer-No Net" (solid, remove dead copper, pour order 54): 2005,240 2005,210 2005,200 2040,200 2050,210 2070,210 2085,195 2085,185 2163.79,185 2173.26,194.47 2173.26,244.47 2205,276.21 2235,306.21 2235,345 2195,345 2150,300 2030,300 2030,240
GND on Top Layer "Top Layer-No Net" (solid, remove dead copper, pour order 52): 1885,395 1885,299.53 1892.1,299.53 1922.57,330 2085,330 2085,393.64 2083.64,395 1885,395
GND on Top Layer "Bottom Layer-No Net" (solid, remove dead copper, pour order 46): 4200,145 4200,-40 2575,-40 2580,-35 2580,260 3375,260 3450,185 3450,144.88
GND on Top Layer "Bottom Layer-No Net" (solid, remove dead copper, pour order 44): 1415,1205 1415,920 1415,865 1575,865 2025,865 2070,820 2070,645 2092.57,645 2095,647.43 2207.57,760 2260,760 2360,760 2375,745 2710,745 3355,745 4190,745 4190,1220 4185,1225
GND on Top Layer "Bottom Layer-No Net" (solid, remove dead copper, pour order 40): 2075,-35 2075,280 2075,830 2675,830 3355,830 3355,755 3355,745 3405,695 3410,690 3410,615 3410,370 3450,330 3450,170 3450,-35
GND on Top Layer "Bottom Layer-No Net" (solid, remove dead copper, pour order 35): 1075,35 1075,315 1035,355 890.95,355 869.74,355 859.74,365 846.1,378.64 846.1,425 811.1,460 790,460 790,450 785,450 750,450 735,450 735,410 770,410 770,375 770,360 770,350 700,350 675,350 635,310 630,305 630,85 680,35
NetL2_1 on Top Layer "Bottom Layer-No Net" (solid, remove dead copper, pour order 15): 1005,1028 1005,1057.93 1007.29,1063.47 1025.07,1090.07 1030,1095 1035,1095 1035,1195 955,1195 955,1100 970,1100 986.46,1083.54 995,1062.93 995,1028
5VCC on Top Layer "Bottom Layer-No Net" (solid, remove dead copper, pour order 13): 950,1025 850,1025 850,1190 950,1190
GND on Top Layer "Bottom Layer-No Net" (solid, remove dead copper, pour order 11): 850,865 983,865 983,983 1035,983 1035,950 1055,950 1055,1050 1034,1050 1034,1020 1025,1020 965,1020 965,1015 850,1015
12VCC on Top Layer "Bottom Layer-No Net" (solid, remove dead copper, pour order 9): 990,865 990,975 1030,975 1030,950 1030,945 1040,945 1040,865
NetL1_1 on Top Layer "Bottom Layer-No Net" (solid, remove dead copper, pour order 16): 1290,1028 1290,1057.93 1292.29,1063.47 1310.07,1090.07 1315,1095 1320,1095 1320,1195 1240,1195 1240,1100 1255,1100 1271.46,1083.54 1280,1062.93 1280,1028
3.3VCC on Top Layer "Bottom Layer-No Net" (solid, remove dead copper, pour order 14): 1235,1025 1135,1025 1135,1190 1235,1190
GND on Top Layer "Bottom Layer-No Net" (solid, remove dead copper, pour order 12): 1135,865 1268,865 1268,983 1320,983 1320,950 1340,950 1340,1050 1319,1050 1319,1020 1310,1020 1250,1020 1250,1015 1135,1015
12VCC on Top Layer "Bottom Layer-No Net" (solid, remove dead copper, pour order 10): 1275,865 1275,975 1315,975 1315,950 1315,940 1325,940 1325,865
12VCC on Top Layer "Bottom Layer-No Net" (solid, remove dead copper, pour order 19): 450,1205 450,1015 830,1015 830,1205
GND on Top Layer "Bottom Layer-No Net" (solid, remove dead copper, pour order 21): 450,1005 450,830 480,800 805,800 830,800 830,1005
GND on Top Layer "Bottom Layer-No Net" (solid, remove dead copper, pour order 33): 435,1205 400,1205 0,1205 0,950 0,-35 1.18,-33.82 221.96,-33.82 2103.82,-33.82 2105,-35 2102.61,-32.61 2102.61,31.63 2031.63,31.63 2025,25 2024,26 1875,26 1314,26 1280.76,59.24 1266.53,45 725,45 620,150 620,180 590,210 580,220 580,550 580,780 585,785 435,785
GND on Top Layer "Bottom Layer-No Net" (solid, remove dead copper, pour order 42): 3525,280 3525,255 4190,255 4190,785 3525,785
GND on Bottom Layer "Bottom Layer-No Net" (solid, remove dead copper, pour order 38): 0,1225 4200,1225 4200,-50 0,-50

## Keep-outs
Keep-Out Layer:
  lines w10: 10,215 ccw(c250,215) 250,-25 3940,-25 ccw(c3940,215) 4180,215 4180,965 ccw(c3940,965) 3940,1205 250,1205 ccw(c250,965) 10,965 10,215

## Silkscreen, mask and mechanical layers (free items; w line width, h text height)
Top Overlay:
  lines w7.87: 2099.65,800 2457.92,800 ; 2470.87,0 2829.13,0 ; 2470.87,800 2829.13,800
  text "HydroPWNics" at 2580,990 h90
  text "Module Hub Rev1" at 2495,920 h90
  text "June 2015" at 2760,855 h90
  text "P" at 1805,825 h380
  text "b" at 3225,515 h100
Bottom Overlay:
  text "p" at 415,695 h430
  text "HyroPWNics Open Source Garden Control" at 3235.69,120.36 h80
  text "b" at 445,80 h270
  text "https://hackaday.io/project/2964-hydropwnics" at 3235.69,60.36 h75
Mechanical 15:
  the board outline again, w10

## Text inside footprints (layer, text, board x,y; h text height)
U4: Top Overlay "ESP8266" at 3598.03,619.92 h157.48; Mechanical 13 "ANTENNA AREA" at 4403.82,829.92 h10 r270; Mechanical 13 "CUTOUT POLYGON" at 4383.82,829.92 h10 r270